# EAGLE board encorder (EAGLE 9.6.1)
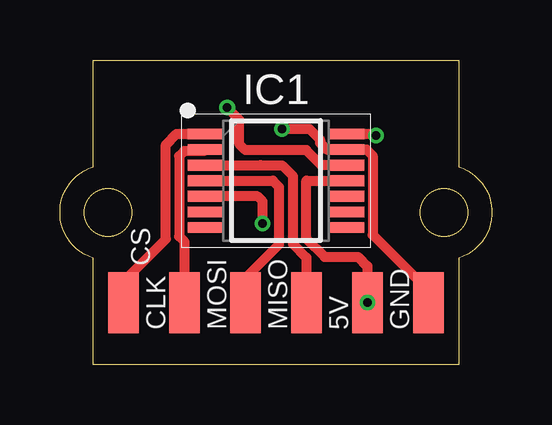
[diagram p0: board, top side]
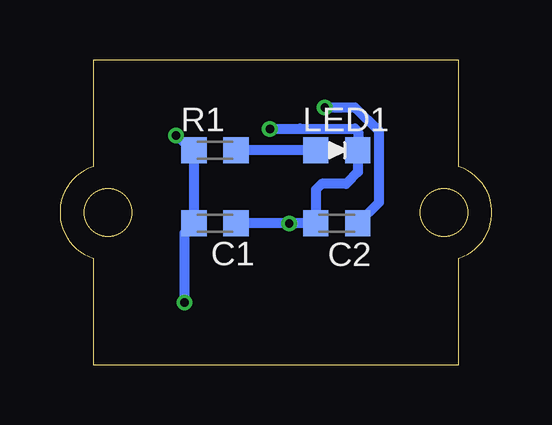
[diagram p1: board, bottom side, seen from below]

Size 17.99 x 12.7 mm. Coordinates in mm from the lower left corner, seen from the top.
Outline: 1.38,8.25 1.38,12.7 16.62,12.7 16.62,8.25 arc-144 16.62,4.45 16.62,0 1.38,0 1.38,4.45 arc-144 1.38,8.25
Outline: circle at 16,6.35 radius 1
Outline: circle at 2,6.35 radius 1
Copper layers (1*16): Top 0.035mm / dielectric 1.6mm / Bottom 0.035mm
Design rules "Elecrow_2-layer_PCB_eagle_rule": minimum track width 6mil, minimum drill 12mil, track to track 6mil, track to pad 6mil, pad to pad 6mil, via to via 8mil, smd to smd 0mil, copper to edge 20mil, drill to drill 10mil, minimum pad ring 6mil, minimum via ring 6mil, stop-mask expansion 0mil, vias tented up to drill 100mil, thermal gap 10mil

## Footprints (pad centres in the part's own frame; a part is rotated, then mirrored left to right if it is on the bottom)
SMD1,27-2,54 = smd 1.27 x 2.54: 1 0,0
SMD1608 = smd 1.05 x 1.08: 1 -0.875,0; 2 0.875,0
SOP65P640X120-14N = smd 1.475 x 0.45: 1 -2.938,1.95; 2 -2.938,1.3; 3 -2.938,0.65; 4 -2.938,0; 5 -2.938,-0.65; 6 -2.938,-1.3; 7 -2.938,-1.95; 8 2.938,-1.95; 9 2.938,-1.3; 10 2.938,-0.65; 11 2.938,0; 12 2.938,0.65; 13 2.938,1.3; 14 2.938,1.95
LED1608 = smd 1.05 x 1.08: A -0.875,0; K 0.875,0

## Placement (x,y rotation side)
5V  [SMD1,27-2,54]  12.81,2.59 0 top
C1  100nF  [SMD1608]  11.54,5.89 0 bottom
C2  1µF  [SMD1608]  6.46,5.89 180 bottom
CLK  [SMD1,27-2,54]  5.19,2.59 0 top
CS  [SMD1,27-2,54]  2.65,2.59 0 top
GND  [SMD1,27-2,54]  15.35,2.59 0 top
IC1  AS5047P-ATSM  [SOP65P640X120-14N]  9,7.67 0 top
LED1  LED1608  [LED1608]  6.46,8.94 0 bottom
MISO  [SMD1,27-2,54]  10.27,2.59 0 top
MOSI  [SMD1,27-2,54]  7.73,2.59 0 top
R1  1kΩ  [SMD1608]  11.54,8.94 0 bottom

## Library data of the parts
5V CLK CS GND MISO MOSI = wirepad
C1 C2 LED1 R1 = generic
IC1 = rcssl_lib; DESCRIPTION: Board Mount Hall Effect / Magnetic Sensors 14 bit core res Up to 28krpm; HEIGHT: 1.2mm; MANUFACTURER_NAME: ams; MANUFACTURER_PART_NUMBER: AS5047P-ATSM; SUPPLIER_NAME: RS

## Nets
GND: C1.2 C2.2 GND.1 IC1.5 IC1.13 LED1.K
N$1: C2.1 IC1.12
N$2: CS.1 IC1.1
N$3: CLK.1 IC1.2
N$4: IC1.3 MISO.1
N$5: IC1.4 MOSI.1
N$6: LED1.A R1.2
VCC: 5V.1 C1.1 IC1.11 IC1.14 R1.1

## Tracks (layer width: path | path; a pad name or v marks a point on that pad's centre or on a via)
GND  (via drill 0.35)
  Top 0.406: IC1.5 8.24,7.02 8.44,6.81 v8.44,5.89 | GND.1 15.35,3.1 13.03,5.42 13.03,8.72 12.78,8.97 IC1.13 11.12,8.97 10.84,9.25 10.84,9.38 10.39,9.83 v9.25,9.83
  Bottom 0.406: C1.2 v8.44,5.89 C2.2 7.33,7.3 7.09,7.54 6.08,7.54 5.58,8.04 LED1.K 5.57,8.95 5.57,9.7 5.7,9.84 8,9.84 8.01,9.83 v9.25,9.83
N$1  (via drill 0.35)
  Top 0.406: v6.97,10.72 7.47,10.21 7.47,9.19 7.73,8.94 10.27,8.94 10.89,8.32 IC1.12
  Bottom 0.406: C2.1 4.7,6.77 4.7,9.72 5.7,10.72 v6.97,10.72
N$2
  Top 0.406: CS.1 2.65,3.48 4.41,5.24 4.41,9.18 4.85,9.62 IC1.1
N$3
  Top 0.406: IC1.2 5.99,8.9 5.17,8.9 4.97,8.69 4.97,5.35 5.17,5.14 5.19,5.13 CLK.1
N$4
  Top 0.406: IC1.3 8.35,8.32 8.36,8.31 9.25,8.31 9.71,7.85 9.71,5.03 10.27,4.47 MISO.1
N$5
  Top 0.406: IC1.4 8.87,7.67 9.12,7.42 9.12,5 7.73,3.61 MOSI.1
N$6
  Bottom 0.406: LED1.A R1.2
VCC  (via drill 0.35)
  Top 0.406: 5V.1 12.81,4.11 12.43,4.5 11.03,4.5 10.27,5.26 10.27,7.67 IC1.11 | IC1.14 13.09,9.62 v13.16,9.55
  Bottom 0.305: v13.16,9.55 12.55,8.94 R1.1
  Bottom 0.406: R1.1 C1.1 12.81,5.5 5V.1
  other vias: 12.81,2.59